# Altium PCB Modulo_Generico.PcbDoc
Units mil, origin at the board's own origin, x right, y up, seen from the top; angles counter-clockwise.
Board outline 6000 x 4000 mil, 2 copper layers (Top Layer, Bottom Layer); 31 components, 40 nets, 135 pads, 6 vias.
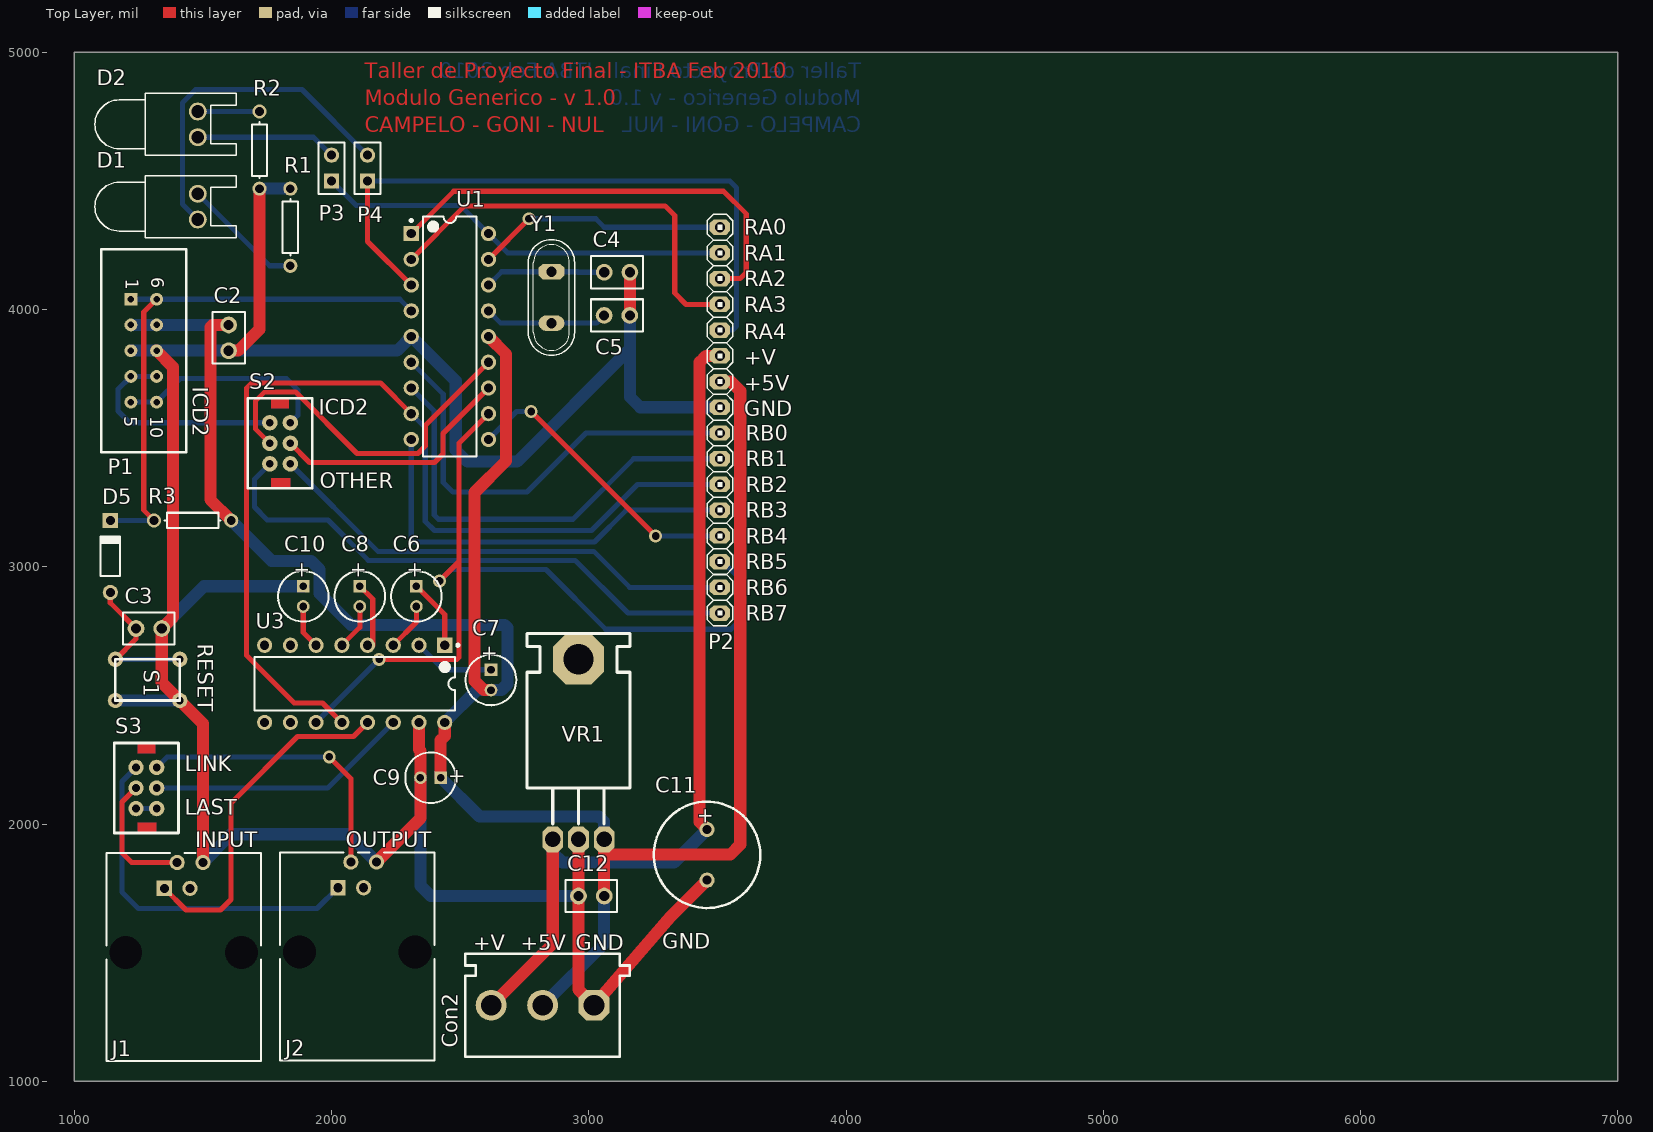
[diagram p0: Top Layer view]
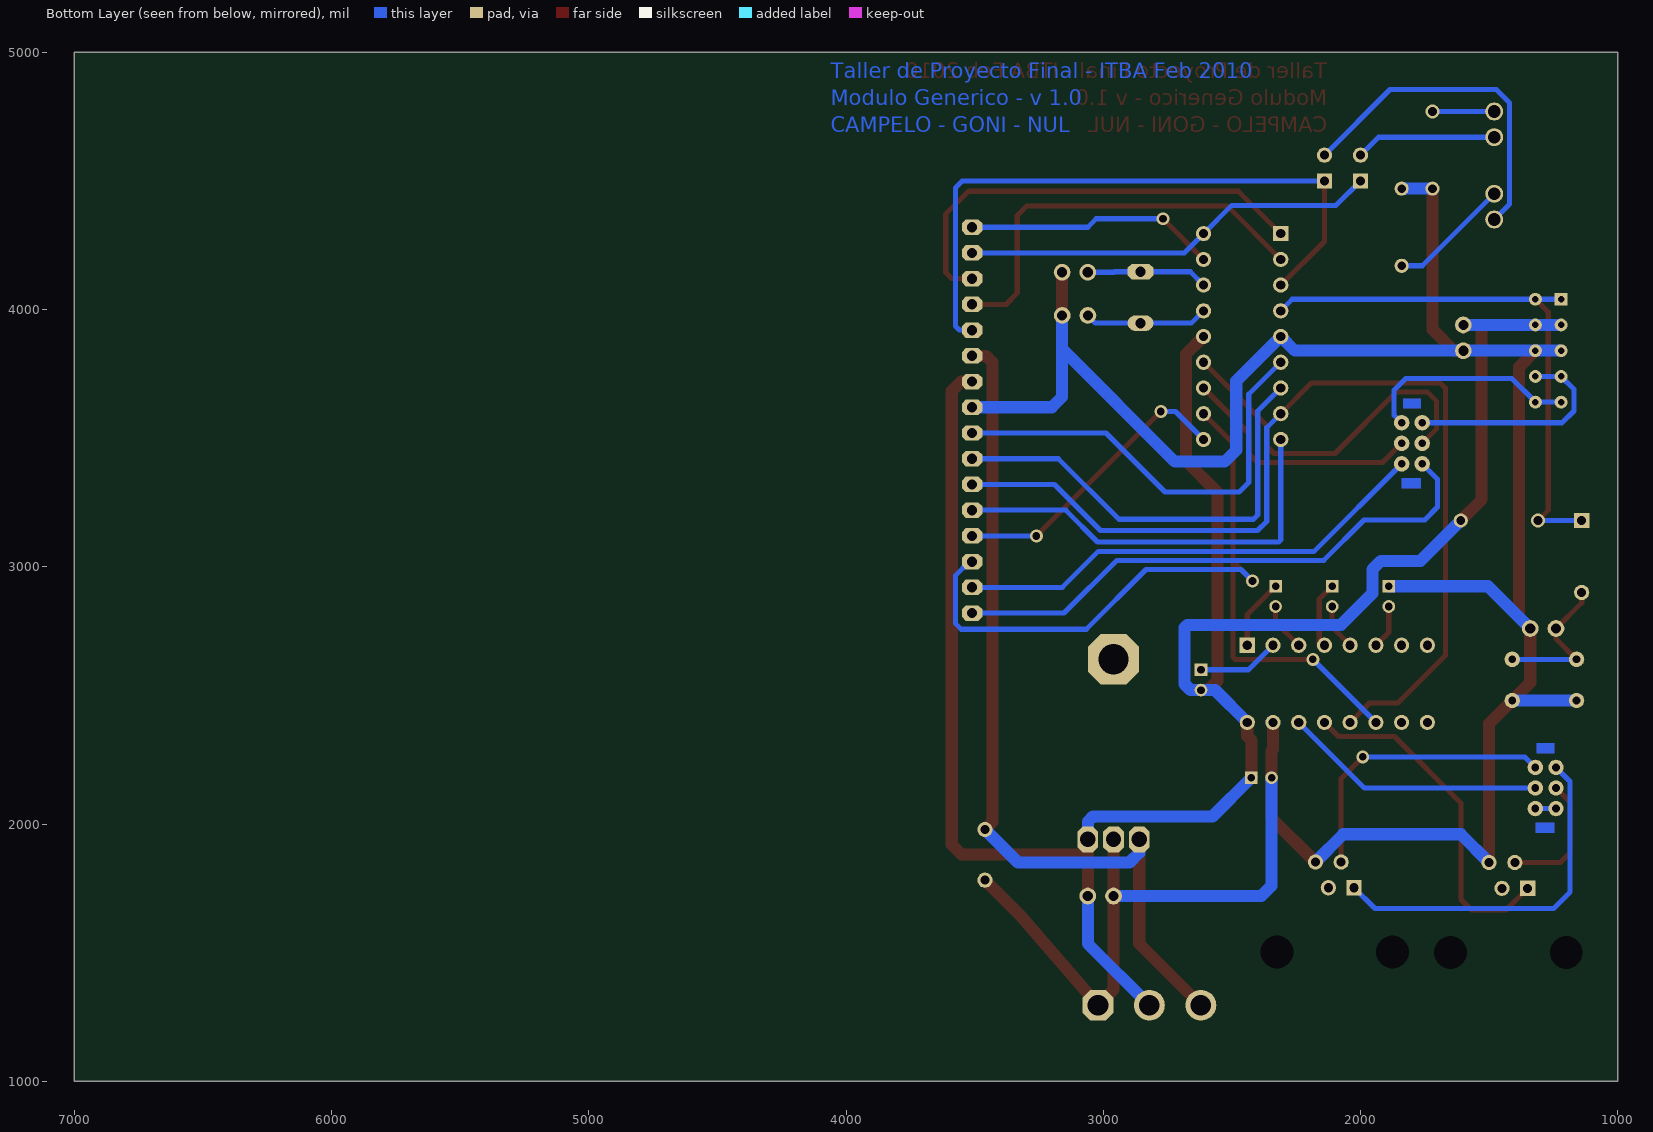
[diagram p1: Bottom Layer view, seen from below]

## Layer stack, top to bottom
Top Layer: signal copper 1.4
Dielectric: dielectric 12.6, FR-4, Dk 4.8
Bottom Layer: signal copper 1.4

## Board outline
1000,1000 7000,1000 7000,5000 1000,5000

## Design rules (kind name [scope] priority, off if disabled: settings)
Clearance [All] p1: gap=15
DiffPairsRouting [All] p1: maxlimit=10 minlimit=10 mostfreqgap=10 maxuncoupledlength=750
PolygonConnect [All] p1: connectstyle=Relief reliefconductorwidth=10 reliefentries=4 polygonreliefangle="90 Angle"
RoutingVias [All] p1: holewidth=30 width=50 viastyle="Through Hole" minholewidth=30 minwidth=50 maxholewidth=50 maxwidth=70
SilkscreenOverComponentPads [All] p1: minsilkscreentomaskgap=10
SolderMaskExpansion [All] p1: expansion=4
Width Signal [NOT (InNet('+5V VCC') OR InNet('+V LOGIC') OR InNet('GND'))] p1: maxlimit=25 minlimit=15 preferedwidth=20 minimp=50.000000 maximp=50.000000 favimp=50.000000
Width Power [(InNet('+5V VCC') OR InNet('+V LOGIC') OR InNet('GND'))] p2: maxlimit=47 minlimit=47 preferedwidth=47 minimp=50.000000 maximp=50.000000 favimp=50.000000
26 further rules are at their usual default settings.

## Components (designator, comment, footprint, x,y, rotation, side; value= is the part's Value field where it differs from the comment)
C2 "Cap" CAPR2.54-5.1x3.2 1600,3890 r90 top
C3 "Cap" CAPR2.54-5.1x3.2 1290,2760 r180 top
C4 "Cap" CAPR2.54-5.1x3.2 3110,4145 r180 top
C5 "Cap" CAPR2.54-5.1x3.2 3109.61,3977.01 r180 top
C6 "Cap Pol1" CAPPR2-5x6.8 2330,2885 r270 top
C7 "Cap Pol1" CAPPR2-5x6.8 2620,2560 r270 top
C8 "Cap Pol1" CAPPR2-5x6.8 2110,2885 r270 top
C9 "Cap Pol1" CAPPR2-5x6.8 2385,2180 r180 top
C10 "Cap Pol1" CAPPR2-5x6.8 1890,2885 r270 top
C11 "Cap Pol1" RB5-10.5 3460,1880 r270 top
C12 "Cap" CAPR2.54-5.1x3.2 3010,1720 r0 top
Con2 "POWER_A" My_CN3 3120,1095 r180 top
D1 "LED0" LED-0 1480,4400 r270 top
D2 "LED0" LED-0 1480,4720 r270 top
D5 "Diode 1N4148" DIO7.1-3.9x1.9 1140,3040 r90 top
J1 "SERIAL A" 15-43-6245 1425,1077.95 r0 top
J2 "SERIAL B" 15-43-6245 2100,1080 r0 top
P1 "ICD2" HEADER10_5x2_B 1270,3840 r270 top
P2 "Header 16" My_1X16 3510,3570 r270 top
P3 "LED2" HDR1X2 2000,4500 r90 top
P4 "LED1" HDR1X2 2140,4500 r90 top (schematic designator P2)
R1 "Res1" AXIAL-0.3 1840,4320 r90 top
R2 "Res1" AXIAL-0.3 1720,4620 r270 top
R3 "Res1" AXIAL-0.3 1460,3180 r0 top
S1 "SW-PB" TS-063 1285,2560 r270 top
S2 "PROGRAM SELECTION" LD-202mini 1800,3480 r270 top
S3 "SERIAL CHAIN" LD-202mini 1280,2140 r270 top
U1 "PIC16F88" PDIP300-P18 2460,3895 r0 top
U3 "MAX232" PE16A 2090,2545 r270 top
VR1 "7805" My_TO-220 2860.51,1940.51 r0 top
Y1 "20MHz" My_Crystal 2855,4047.01 r270 top

## Footprints (in the part's own frame and the unit in brackets; to place one, negate y for a bottom-side part, rotate by r counter-clockwise, add the part's x,y. Pads: shape width x height; smd on the part's side, far side on the other; paste and mask are expansions set on the pad)
15-43-6245 [mm] "Connector; PCB Jack, Thru-Hole; 1-Port; Unshielded without Lightpipes; Right Angle"
  rect 1.5x1.5 hole 0.9: 1(-1.905,17.07)
  round 1.5 hole 0.9: 2(-0.635,19.61) 3(0.635,17.07) 4(1.905,19.61)
  round 2.95 hole 3.25 unplated: MH1(-5.715,10.72) MH2(5.715,10.72)
  silkscreen extent -7.62,0 7.62,20.57
AXIAL-0.3 [mm] "Axial Device, Thru-Hole; 2 Leads; 0.3 in Pin Spacing"
  round 1.4 hole 0.85: 1(-3.81,0) 2(3.81,0)
  silkscreen extent -2.77,-0.76 2.77,0.76
CAPPR2-5x6.8 [mm] "Capacitor, Electrolytic, Radial; Body 5 x 6.8 mm (Dia.xH typ); Pin Spacing 2 mm (typ)"
  rect 1.25x1.25 hole 0.75: 1(-1,0)
  round 1.25 hole 0.75: 2(1,0)
  silkscreen extent -2.5,-2.5 2.5,2.5
CAPR2.54-5.1x3.2 [mm] "Capacitor, Ceramic, Thru-Hole, Dipped Radial; Body 5.1 x 3.2 mm (WxT) Pin Spacing 2.54 mm (typ)"
  round 1.65 hole 1: 1(-1.27,0) 2(1.27,0)
  silkscreen extent -2.55,-1.6 2.55,1.6
DIO7.1-3.9x1.9 [mm] "Diode, Axial; Body 3.8 x 1.9 mm (LxDia. max), Lead Dia. 0.53 mm (max)"
  round 1.5 hole 0.9: 1(-3.55,0)
  rect 1.5x1.5 hole 0.9: 2(3.55,0)
  silkscreen extent -1.95,-0.95 2.05,0.95
HDR1X2 [mm] "Connector; Header; 2 Position"
  rect 1.5x1.5 hole 0.9: 1(0,0)
  round 1.5 hole 0.9: 2(2.54,0)
  silkscreen extent -1.27,-1.27 3.81,1.27
HEADER10_5x2_B [mil] "Header con polaridad para 10 pines (5x2)"
  rect 50x50 hole 25: 1(-200,-50)
  round 50 hole 25: 2(-100,-50) 3(0,-50) 4(100,-50) 5(200,-50) 6(-200,50) 7(-100,50) 8(0,50) 9(100,50) 10(200,50)
  silkscreen extent -395,-165 395,165
LD-202mini [mil] "Doble inversor mini 90 grados"
  round 60 hole 30: 1(0,40) 2(-80,40) 3(80,40) 4(0,-40) 5(-80,-40) 6(80,-40)
  Multi-Layer region: -175,-35 -135,-35 -135,35 -175,35
  Multi-Layer region: 135,-35 175,-35 175,40 135,40
  silkscreen extent -175,-125 175,125
LED-0 [mil] "Typical INFRARED GaAs LED; 2 Leads"
  round 70 hole 50: 1(50,0) 2(-50,0)
  silkscreen extent -120,-400 120,150
My_1X16 [mil]
  oct 60x80 hole 40: 1(-750,0) 2(-650,0) 3(-550,0) 4(-450,0) 5(-350,0) 6(-250,0) 7(-150,0) 8(-50,0) 9(50,0) 10(150,0) 11(250,0) 12(350,0) 13(450,0) 14(550,0) 15(650,0) 16(750,0)
  silkscreen extent -800,-50 800,50
My_CN3 [mil]
  oct 120x120 hole 80: 1(99.5,-200.5)
  round 120 hole 80: 2(299.5,-200.5) 3(499.5,-200.5)
  silkscreen extent -40,-400 600,0
My_Crystal [mil]
  oct 60x100 hole 40: 1(-100,0)
  oval 60x100 hole 40: 2(100,0)
  silkscreen extent -225,-90 225,90
My_TO-220 [mil]
  oct 196.85x196.85 hole 118.11: 0(99.49,699.49)
  oct 80x100 hole 60: 1(-0.5,-0.5) 2(99.5,-0.5) 3(199.5,-0.5)
  silkscreen extent -100,60 300,800
PDIP300-P18 [mm] "DIP, 18-Leads, Row Spacing 7.62mm, Pitch 2.54mm, Body 22.9x6.6mm"
  rect 1.5x1.5 hole 0.9: 1(-3.81,10.16)
  round 1.5 hole 0.9: 2(-3.81,7.62) 3(-3.81,5.08) 4(-3.81,2.54) 5(-3.81,0) 6(-3.81,-2.54) 7(-3.81,-5.08) 8(-3.81,-7.62) 9(-3.81,-10.16) 10(3.81,-10.16) 11(3.81,-7.62) 12(3.81,-5.08) 13(3.81,-2.54) 14(3.81,0) 15(3.81,2.54) 16(3.81,5.08) 17(3.81,7.62) 18(3.81,10.16)
  silkscreen extent -3.93,-11.85 2.65,11.85, body extent -3.6,-11.8 3.6,11.8, height 5.34
PE16A [mm] "DIP, 16-Leads, Row Spacing 7.62mm, Pitch 2.54mm, Body 19.18x6.99mm"
  rect 1.5x1.5 hole 0.9: 1(-3.81,8.89)
  round 1.5 hole 0.9: 2(-3.81,6.35) 3(-3.81,3.81) 4(-3.81,1.27) 5(-3.81,-1.27) 6(-3.81,-3.81) 7(-3.81,-6.35) 8(-3.81,-8.89) 9(3.81,-8.89) 10(3.81,-6.35) 11(3.81,-3.81) 12(3.81,-1.27) 13(3.81,1.27) 14(3.81,3.81) 15(3.81,6.35) 16(3.81,8.89)
  silkscreen extent -3.93,-9.9 2.65,10.32, body extent -3.3,-9.9 3.3,9.9, height 5.08
RB5-10.5 [mm] "Motor, General Kind; 2 Leads"
  round 1.5 hole 0.9: 1(-2.5,0) 2(2.5,0)
  silkscreen extent -5.25,-5.25 5.25,5.25
TS-063 [mil] "Boton normal abierto"
  round 60 hole 30: 1(80,125) 1(80,-125) 2(-80,125) 2(-80,-125)
  silkscreen extent -80,-125 80,125

## Part data
C2 C3 C4 C5 C12: "Capacitor"
C6 C7 C8 C9 C10 C11: "Polarized Capacitor (Radial)"
Con2: library part "CON3 pin Green", "Connector green screw"
D1 D2: "Typical INFRARED GaAs LED"
D5: "High Conductance Fast Diode"
J1 J2: library part 15-43-6245, "Right Angle, Standard Profile, RJ45-Keyed, Flange Mount PCB Jack"
P1: library part "Header 5X2A", "Header, 5-Pin, Dual row"
P2: "Header, 16-Pin"
P3 P4: library part "Header 2", "Header, 2-Pin"
R1 R2 R3: "Resistor"
S1: "Switch"
S2 S3: library part SW-DPDT, "Double-Pole, Double-Throw Switch"
U1: library part PIC16F88-E/P, "Enhanced FLASH Microcontroller with nanoWatt Technology, 10-Bit A/D, 4K (x14-Bit words) FLASH, 368 Bytes RAM, 18-Pin PDIP, Standard VDD Range, Extended Temperature"
U3: library part MAX232ACPE, "+5V Powered, Multi-Channel RS-232 Driver/Receiver"
VR1: library part "Volt Reg", "Voltage Regulator"
Y1: library part XTAL, "Crystal Oscillator"

## Via types
v1: diameter 50, hole 30, Top Layer to Bottom Layer, 6 vias

## Nets (pads, with @x,y where several pads share a name; then routed paths per layer and width w, separated by ;. In a path a pad name is that pad's centre, name@x,y a point inside that pad or via, vN(x,y) a via of type N, cw(c..) or ccw(c..) an arc to the next point about the centre after c; other vN are vias at no path point)
"+5V VCC": C2.2 C7.2 C9.1 C12.2 Con2.2 P1.2 P1.7 P2.7 R3.2 U1.14 U3.16 VR1.3 | length 8764.1
  Top Layer w47: C2.2 1538,3940 1529,3931 1529,3261 R3.2 ; C9.1 2424.37,2325.74 2440,2341.37 U3.16 ; U1.14 2679,3826 2679,3412 2556,3289 2556,2556.63 2592,2520.63 C7.2 ; C12.2 3060,1830 3060.01,1881 ; P2.7 3552,3720 3589,3683 3589,1920 3550,1881 3060.01,1881 ; 3060.01,1881 VR1.3 3060.01,1881
  Bottom Layer w47: P1.2 P1.7 C2.2 ; R3.2 1767,3023 1920,3023 1954,2989 1954,2896 2076,2774 2673,2774 2684,2763 2684,2544 2660.63,2520.63 C7.2 2565.63,2520.63 U3.16 ; C9.1 2575.37,2029 3040,2029 3060.01,2008.99 VR1.3 ; Con2.2 3060,1535 C12.2
"+V LOGIC": C11.1 Con2.3 P2.6 VR1.1 | length 3382.6
  Top Layer w47: Con2.3 2860.01,1535.01 VR1.1 ; C11.1 3431,2007.43 3431,3795 3456,3820 P2.6
  Bottom Layer w47: VR1.1 2860.01,1888 2898.01,1850 3331.57,1850 C11.1
GND: C2.1 C3.1 C4.1 C5.1 C9.2 C10.1 C11.2 C12.1 Con2.1 J1.4 J2.4 P1.3 P1.8 P2.8 R1.2 R2.2 S1.1 U1.5 U3.15 VR1.2 | length 11032.9
  Top Layer w47: P1.8 1384,3776 1384,2804 C3.1 1340,2550 1410,2480 1500,2390 J1.4 ; C2.1 1637,3840 1720,3923 R2.2 ; J2.4 2345.63,2022.68 C9.2 2345.63,2284 2340,2289.63 U3.15 ; VR1.2 2960.01,1830.01 C12.1 2960,1356 Con2.1 3318,1639.57 C11.2 ; C5.1 3159.61,4016.4 3160,4016.8 C4.1
  Bottom Layer w47: S1.1@1160,2480 S1.1@1410,2480 ; P1.3 P1.8 C2.1 2255,3840 U1.5 2483.03,3721.97 2483.03,3453.47 2528,3408.5 2721.5,3408.5 3159.61,3846.61 ; C3.1 1504.37,2924.37 C10.1 ; J1.4 1610,1960 2067.05,1960 J2.4 ; R2.2 R1.2 ; C9.2 2345.63,1760 2385.63,1720 C12.1 ; P2.8 3200,3620 3159.61,3660.39 3159.61,3846.61 ; 3159.61,3846.61 C5.1 3159.61,3846.61
ICD2_CLK: P1.5 P1.10 S2.2 | length 844.8
  Bottom Layer w20: P1.5 P1.10 1412,3732 1824,3732 1869,3687 1869,3589 S2.2
ICD2_CLK/RB6: S2.1 U1.12 | length 967.4
  Top Layer w20: S2.1 1914.53,3405.47 2400,3405.47 2433.23,3438.7 2433.23,3518.23 U1.12
ICD2_DATA: P1.4 P1.9 S2.5 | length 863.8
  Bottom Layer w20: P1.9 P1.4 1170,3690 1170,3606 1216,3560 S2.5
ICD2_DATA/RB7: S2.4 U1.13 | length 1400.5
  Top Layer w20: S2.4 1705,3535 1705,3645 1740,3680 1860,3680 2099.53,3440.47 2336,3440.47 2364.53,3469 2364.53,3549.53 U1.13
LED1: D1.1 P4.2 | length 1325
  Bottom Layer w20: D1.1 1420,4410 1420,4803 1472,4855 1885,4855 P4.2
LED2: D2.1 P3.2 | length 549
  Bottom Layer w20: D2.1 1930,4670 P3.2
MAX_TX: S3.1 U3.14 | length 1025.6
  Bottom Layer w20: S3.1 1985,2140 U3.14
MCLR: D5.2 P1.1 P1.6 R3.1 U1.4 | length 2176
  Top Layer w20: R3.1 1270,3220 1270,3990 P1.6
  Bottom Layer w20: D5.2 1224,3179.76 1224.24,3180 R3.1 ; P1.1 P1.6 2265,4040 U1.4
NetC3_2: C3.2 D5.1 S1.2 | length 584.8
  Top Layer w20: D5.1 1140,2860 C3.2 1240,2720 S1.2@1160,2640
  Bottom Layer w20: S1.2@1160,2640 S1.2@1410,2640
NetC4_2: C4.2 U1.16 Y1.1 | length 472.4
  Bottom Layer w20: U1.16 2662.01,4147.01 Y1.1 2956,4147.01 2958.01,4145 C4.2
NetC5_2: C5.2 U1.15 Y1.2 | length 481.9
  Bottom Layer w20: U1.15 2657.99,3947.01 Y1.2 3029.61,3947.01 C5.2
NetC6_1: C6.1 U3.1 | length 274.9
  Top Layer w20: C6.1 2440,2814.37 U3.1
NetC6_2: C6.2 U3.3 | length 187.9
  Top Layer w20: U3.3 2330,2785 C6.2
NetC7_1: C7.1 U3.2 | length 319.6
  Bottom Layer w20: U3.2 2435.63,2599.37 C7.1
NetC8_1: C8.1 U3.4 | length 270.1
  Top Layer w20: C8.1 2160,2874.37 2160,2695 U3.4
NetC8_2: C8.2 U3.5 | length 179.6
  Top Layer w20: U3.5 2110,2765 C8.2
NetC10_2: C10.2 U3.6 | length 171.3
  Top Layer w20: C10.2 1890,2745 U3.6
NetD1_2: D1.2 R1.1 | length 476
  Bottom Layer w20: D1.2 1760,4170 R1.1
NetD2_2: D2.2 R2.1 | length 240
  Bottom Layer w20: D2.2 R2.1
NetS3_3: S3.3 S3.6 | length 80
  Bottom Layer w20: S3.6 S3.3
RA0: P2.1 U1.17 | length 979.1
  Top Layer w20: U1.17 v1(2768,4353)
  Bottom Layer w20: v1(2768,4353) 3027,4353 3060,4320 P2.1
RA1: P2.2 P3.1 U1.18 | length 1626
  Bottom Layer w20: P3.1 2095,4405 2500,4405 U1.18 2685,4220 P2.2
RA2: P2.3 U1.1 | length 1746.7
  Top Layer w20: U1.1 2475,4460 3524,4460 3612,4372 3612,4144 3588,4120 P2.3
RA3: P2.4 U1.2 | length 1621.3
  Top Layer w20: U1.2 2518.16,4403.16 3296,4403.16 3334,4365.16 3334,4064 3378,4020 P2.4
RA4: P2.5 P4.1 U1.3 | length 2530.2
  Top Layer w20: P4.1 2140,4265 U1.3
  Bottom Layer w20: P4.1 3548,4500 3575,4473 3575,3936 3559,3920 P2.5
RB0: P2.9 U1.6 | length 1704.2
  Bottom Layer w20: U1.6 2434.53,3670.47 2434.53,3328 2471.53,3291 2760,3291 2989,3520 P2.9
RB1: P2.10 U1.7 | length 1746
  Bottom Layer w20: U1.7 2399.53,3605.47 2399.53,3200.94 2416,3184.47 2939,3184.47 3174.53,3420 P2.10
RB2: P2.11 U1.8 U3.12 | length 3891.5
  Top Layer w20: U3.12 1965,2470 1855,2470 1670,2655 1670,3694.7 1690.3,3715 2190,3715 U1.8
  Bottom Layer w20: U1.8 2364.53,3540.47 2364.53,3176.06 2400,3140.59 3010.43,3140.59 3189.84,3320 P2.11
RB3: P2.12 U1.9 | length 1644.6
  Bottom Layer w20: U1.9 2310,3105.25 2318.78,3096.47 3021.91,3096.47 3145.43,3220 P2.12
RB4: P2.13 U1.10 | length 1145.6
  Top Layer w20: v1(2776,3604) v1(3260,3120)
  Bottom Layer w20: U1.10 2719,3604 v1(2776,3604) ; v1(3260,3120) P2.13
RB5: P2.14 U1.11 U3.11 | length 3772.1
  Top Layer w20: v1(2185,2640) 2487,2640 2495,2648 2495,3020 ; v1(2420,2945) 2495,3020 ; U1.11 2495,3480 ; 2495,3020 2495,3480 ; 2495,3020 2495,3480
  Bottom Layer w20: U3.11 v1(2185,2640) ; v1(2420,2945) 2464,2989 2834.25,2989 3066.25,2757 3552,2757 3575,2780 3575,2965 3520,3020 P2.14
RB6: P2.15 S2.3 | length 1868.8
  Bottom Layer w20: S2.3 2180,3060 3019,3060 3159,2920 P2.15
RB7: P2.16 S2.6 | length 2173.5
  Bottom Layer w20: S2.6 1700,3340 1700,3232 1750,3182 1986,3182 2143,3025 2947,3025 3152,2820 P2.16
SERIAL_A_RX: J1.2 S3.4 | length 505.5
  Top Layer w20: S3.4 1185,2085 1185,1888 1223,1850 J1.2
SERIAL_A_TX: J1.1 U3.13 | length 1345.8
  Top Layer w20: J1.1 1434,1666 1568,1666 1609,1707 1609,2081 1868,2340 2085,2340 U3.13
SERIAL_B_RX: J2.2 S3.2 | length 1131.7
  Top Layer w20: v1(1991,2261) 2075,2177 J2.2
  Bottom Layer w20: S3.2 1361,2261 v1(1991,2261)
SERIAL_B_TX: J2.1 S3.5 | length 1407.9
  Bottom Layer w20: S3.5 1185,2165 1185,1735 1249,1671 1943.95,1671 J2.1
pads on no net: J1.3 J1.MH1 J1.MH2 J2.3 J2.MH1 J2.MH2 U3.7 U3.8 U3.9 U3.10 VR1.0

## Other copper
Top Layer:
  text "Taller de Proyecto Final - ITBA Feb 2010" at 2130,4900 h60
  text "Modulo Generico - v 1.0" at 2130,4795 h60
  text "CAMPELO - GONI - NUL" at 2130,4690 h60
Bottom Layer:
  text "Taller de Proyecto Final - ITBA Feb 2010" at 4060,4900 h60
  text "Modulo Generico - v 1.0" at 4060,4795 h60
  text "CAMPELO - GONI - NUL" at 4060,4690 h60

## Silkscreen, mask and mechanical layers (free items; w line width, h text height)
Top Overlay:
  text "RA0" at 3605,4290 h60
  text "RA1" at 3605,4190 h60
  text "RA2" at 3605,4090 h60
  text "RA3" at 3605,3990 h60
  text "RA4" at 3605,3885 h60
  text "+V" at 3605,3785 h60
  text "+5V" at 3605,3685 h60
  text "ICD2" at 1950,3590 h60
  text "GND" at 3605,3585 h60
  text "RB0" at 3610,3490 h60
  text "RB1" at 3610,3390 h60
  text "OTHER" at 1955,3305 h60
  text "RB2" at 3610,3290 h60
  text "RB3" at 3610,3190 h60
  text "RB4" at 3610,3090 h60
  text "RB5" at 3610,2990 h60
  text "RB6" at 3610,2890 h60
  text "RB7" at 3610,2790 h60
  text "RESET" at 1480,2700 h60 r270
  text "LINK" at 1430,2205 h60
  text "LAST" at 1430,2035 h60
  text "INPUT" at 1470,1910 h60
  text "OUTPUT" at 2055,1910 h60
  text "GND" at 3285,1515 h60
  text "+V" at 2550,1510 h60
  text "+5V" at 2735,1510 h60
  text "GND" at 2950,1510 h60

## Text inside footprints (layer, text, board x,y; h text height)
C6: Top Overlay "+" at 2300.47,3021.81 h59.06 r270
C7: Top Overlay "+" at 2590.47,2696.81 h59.06 r270
C8: Top Overlay "+" at 2080.47,3021.81 h59.06 r270
C9: Top Overlay "+" at 2521.81,2209.53 h59.06 r180
C10: Top Overlay "+" at 1860.47,3021.81 h59.06 r270
C11: Top Overlay "+" at 3430,2065 h59.06 r270
P1: Top Overlay "1" at 1200,4120 h50 r270; Top Overlay "5" at 1195,3585 h50 r270; Top Overlay "10" at 1295,3585 h50 r270; Top Overlay "6" at 1300,4125 h50 r270